# EAGLE board 2 (EAGLE 6.4)
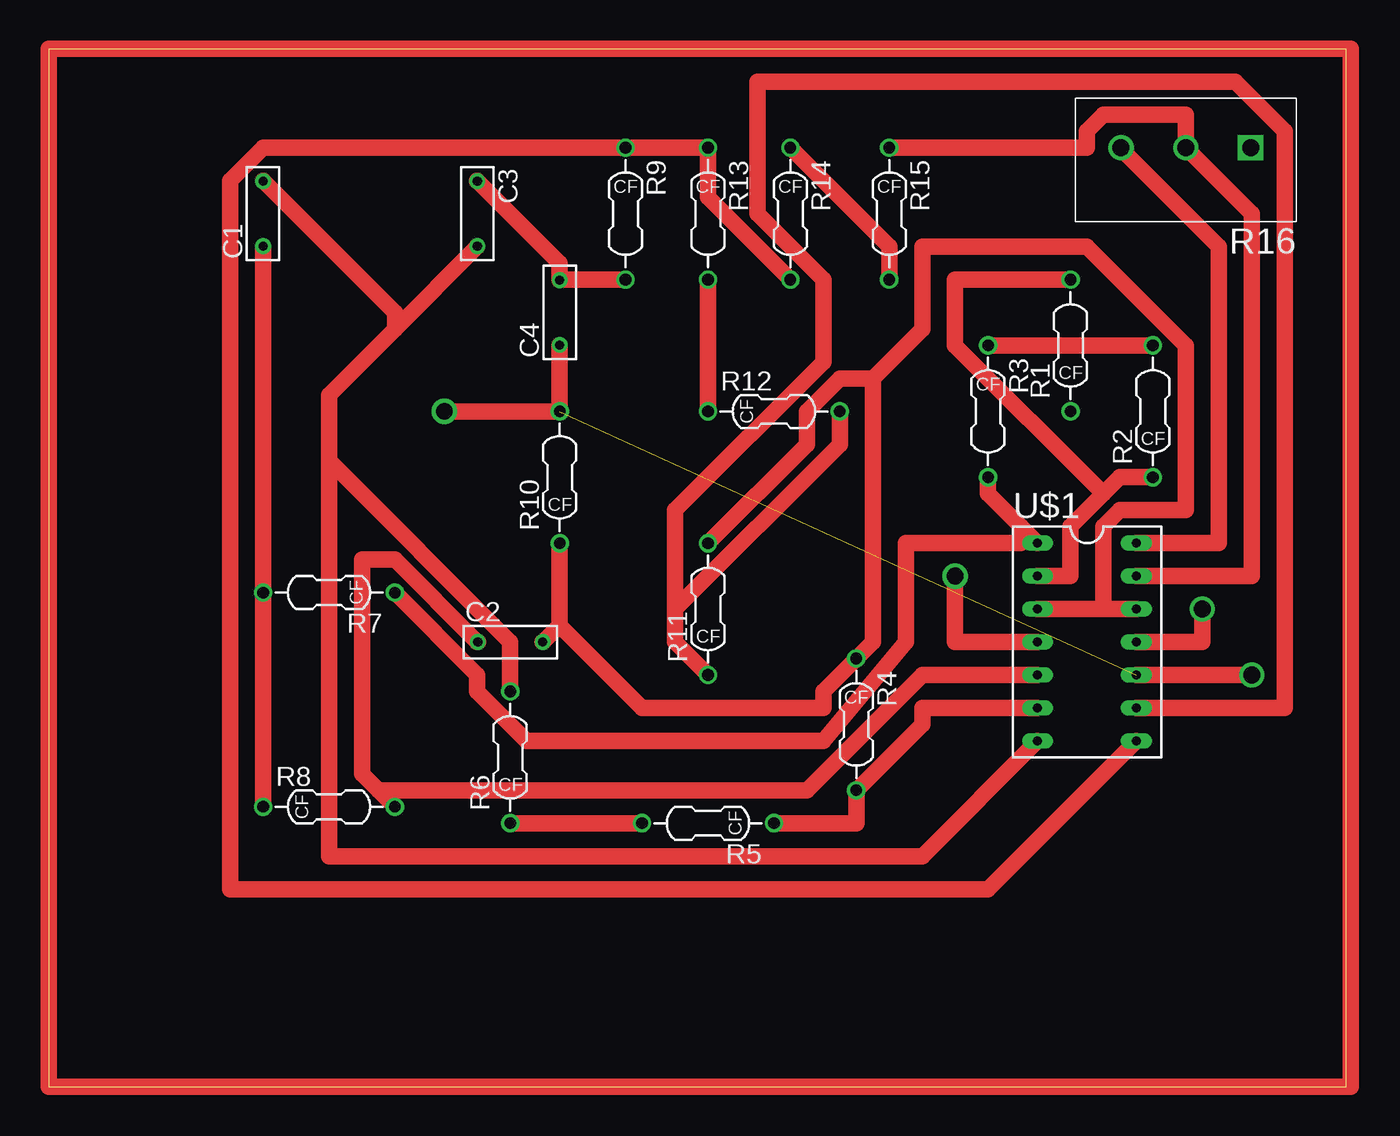
[diagram p0: board, top side]

Size 100 x 80 mm. Coordinates in mm from the lower left corner, seen from the top.
Outline: 0,0 100,0 100,80 0,80 0,0
Copper layers (1*16): Top 0.035mm / dielectric 1.5mm / Bottom 0.035mm
Design rules "default": minimum track width 10mil, minimum drill 24mil, track to track 8mil, track to pad 8mil, pad to pad 8mil, via to via 8mil, smd to smd 8mil, copper to edge 40mil, drill to drill 8mil, minimum pad ring 10mil, minimum via ring 8mil, stop-mask expansion 4mil, vias tented up to drill 0mil, thermal gap 10mil
Net classes: 0 default: width 1.27 mm, drill 1.27 mm, clearance 0.254 mm

## Footprints (pad centres in the part's own frame; a part is rotated, then mirrored left to right if it is on the bottom)
BOX-2.5MM-7.2MM = drill 0.7: P$1 -2.5,0; P$2 2.5,0
0.25W-0.4IN-CARBONFILM = drill 0.9: 1 -5.08,0; 2 5.08,0
POT-SIDE-16MM-BITECH-P160KN = drill 1.3 square: P$1 -5,3.8 | drill 1.3: P$2 0,3.8; P$3 5,3.8
DIP14 = drill 0.7 long: 1 0,7.62; 2 0,5.08; 3 0,2.54; 4 0,0; 5 0,-2.54; 6 0,-5.08; 7 0,-7.62; 8 7.62,-7.62; 9 7.62,-5.08; 10 7.62,-2.54; 11 7.62,0; 12 7.62,2.54; 13 7.62,5.08; 14 7.62,7.62

## Placement (x,y rotation side)
C1  10n  [BOX-2.5MM-7.2MM]  16.51,67.31 90 top
C2  10n  [BOX-2.5MM-7.2MM]  35.56,34.29 0 top
C3  10n  [BOX-2.5MM-7.2MM]  33.02,67.31 270 top
C4  10n  [BOX-2.5MM-7.2MM]  39.37,59.69 90 top
R1  100k  [0.25W-0.4IN-CARBONFILM]  78.74,57.15 90 top
R2  56k  [0.25W-0.4IN-CARBONFILM]  85.09,52.07 90 top
R3  6.8k  [0.25W-0.4IN-CARBONFILM]  72.39,52.07 270 top
R4  100k  [0.25W-0.4IN-CARBONFILM]  62.23,27.94 270 top
R5  56k  [0.25W-0.4IN-CARBONFILM]  50.8,20.32 180 top
R6  2.2k  [0.25W-0.4IN-CARBONFILM]  35.56,25.4 90 top
R7  5.6k  [0.25W-0.4IN-CARBONFILM]  21.59,38.1 180 top
R8  5.6k  [0.25W-0.4IN-CARBONFILM]  21.59,21.59 0 top
R9  56k  [0.25W-0.4IN-CARBONFILM]  44.45,67.31 270 top
R10  56k  [0.25W-0.4IN-CARBONFILM]  39.37,46.99 90 top
R11  100k  [0.25W-0.4IN-CARBONFILM]  50.8,36.83 90 top
R12  56k  [0.25W-0.4IN-CARBONFILM]  55.88,52.07 0 top
R13  2.2k  [0.25W-0.4IN-CARBONFILM]  50.8,67.31 270 top
R14  100  [0.25W-0.4IN-CARBONFILM]  57.15,67.31 270 top
R15  100k  [0.25W-0.4IN-CARBONFILM]  64.77,67.31 270 top
R16  100k  [POT-SIDE-16MM-BITECH-P160KN]  87.63,76.2 180 top
U$1  OPAMP-QUADTL074  [DIP14]  76.2,34.29 0 top

## Library data of the parts
C1-C4 = Capacitors; SPICE: C{NAME} {1.NET} {2.NET} {VALUE}
R1-R15 = Resistors; SPICE: R{NAME} {1.NET} {2.NET} {VALUE}
R16 = Potentiometers; PERCENT: 50; SPICE: R{NAME}CW {3.NET} {2.NET} {{{VALUE} - {{{ATTR.PERCENT} / 100} * {VALUE}}} + 0.001}\nR{NAME}CCW {2.NET} {1.NET} {{{{ATTR.PERCENT} / 100} * {VALUE}} + 0.001}
U$1 = Op Amps; SPICE: X{NAME}A {A.IN+.NET} {A.IN-.NET} {VCC.NET} {VEE.NET} {A.OUT.NET} TL074\nX{NAME}B {B.IN+.NET} {B.IN-.NET} {VCC.NET} {VEE.NET} {B.OUT.NET} TL074\nX{NAME}C {C.IN+.NET} {C.IN-.NET} {VCC.NET} {VEE.NET} {C.OUT.NET} TL074\nX{NAME}D {D.IN+.NET} {D.IN-.NET} {VCC.NET} {VEE.NET} {D.OUT.NET} TL074; SPICEMOD: .SUBCKT TL074 1 2 3 4 5\nC1 11 12 3.498E-12\nC2 6 7 15.00E-12\nDC 5 53 DX\nDE 54 5 DX\nDLP 90 91 DX\nDLN 92 90 DX\nDP 4 3 DX\nEGND 99 0 POLY(2) (3,0) (4,0) 0 .5 .5\nFB 7 99 POLY(5) VB VC VE VLP VLN 0 4.715E6 -5E6 5E6 5E6 -5E6\nGA 6 0 11 12 282.8E-6\nGCM 0 6 10 99 8.942E-9\nISS 3 10 DC 195.0E-6\nHLIM 90 0 VLIM 1K\nJ1 11 2 10 JX\nJ2 12 1 10 JX\nR2 6 9 100.0E3\nRD1 4 11 3.536E3\nRD2 4 12 3.536E3\nRO1 8 5 150\nRO2 7 99 150\nRP 3 4 2.143E3\nRSS 10 99 1.026E6\nVB 9 0 DC 0\nVC 3 53 DC 2.200\nVE 54 4 DC 2.200\nVLIM 7 8 DC 0\nVLP 91 0 DC 25\nVLN 0 92 DC 25\n.MODEL DX D(IS=800.0E-18)\n.MODEL JX PJF(IS=15.00E-12 BETA=270.1E-6 VTO=-1)\n.ENDS

## Nets
0: C2.P$2 R4.1 R10.1 R11.2 U$1.3 U$1.12
N$1: R1.2 R2.1 U$1.2
N$2: R2.2 R3.1
N$3: R3.2 R7.1 U$1.1
N$4: C1.P$1 R7.2 R8.1
N$5: C2.P$1 R8.2 U$1.5
N$6: R4.2 R5.1 U$1.6
N$7: R5.2 R6.1
N$8: R16.P$3 U$1.14
N$9: C3.P$1 C4.P$2 R9.2
N$11: R11.1 R12.2 U$1.9
N$12: R12.1 R13.2
N$13: R1.1
N$14: C4.P$1 R10.2 U$1.10
N$16: R14.1 R15.2
N$17: R15.1 R16.P$2 U$1.13
N$18: C1.P$2 C3.P$2 R6.2 U$1.7
N$19: R9.1 R13.1 R14.2 U$1.8
VCC: U$1.4
VEE: U$1.11

## Tracks (layer width: path | path; a pad name or v marks a point on that pad's centre or on a via)
0
  Top 1.27: 39.37,35.56 38.1,34.29 C2.P$2 | R10.1 39.37,35.56 | U$1.12 81.28,36.83 | 81.28,36.83 U$1.3 | R11.2 58.42,49.53 58.42,52.07 60.96,54.61 63.5,54.61 | 63.5,54.61 63.5,34.29 R4.1 59.69,30.48 59.69,29.21 45.72,29.21 39.37,35.56 | 81.28,36.83 81.28,43.18 82.55,44.45 87.63,44.45 87.63,57.15 80.01,64.77 67.31,64.77 67.31,58.42 63.5,54.61
N$1
  Top 1.27: U$1.2 78.74,39.37 78.74,43.18 81.28,45.72 | 81.28,45.72 82.55,46.99 R2.1 | R1.2 69.85,62.23 69.85,57.15 81.28,45.72
N$2
  Top 1.27: R2.2 R3.1
N$3
  Top 1.27: 74.93,43.18 72.39,45.72 R3.2 | 74.93,43.18 U$1.1 | R7.1 33.02,31.75 33.02,30.48 36.83,26.67 59.69,26.67 66.04,34.29 66.04,41.91 74.93,41.91 74.93,43.18
N$4
  Top 1.27: C1.P$1 R7.2 R8.1
N$5
  Top 1.27: R8.2 25.4,22.86 | 25.4,22.86 24.13,24.13 24.13,40.64 26.67,40.64 33.02,34.29 C2.P$1 | U$1.5 67.31,31.75 58.42,22.86 25.4,22.86
N$6
  Top 1.27: U$1.6 67.31,29.21 67.31,27.94 R4.2 62.23,20.32 R5.1
N$7
  Top 1.27: R5.2 R6.1
N$8
  Top 1.27: U$1.14 90.17,41.91 90.17,64.77 82.55,72.39 R16.P$3
N$9
  Top 1.27: R9.2 39.37,62.23 | 39.37,62.23 39.37,63.5 33.02,69.85 C3.P$1 | 39.37,62.23 C4.P$2
N$10
  Top 1.27: 0,80.01 0,0 100.33,0 100.33,80.01 0,80.01
N$11
  Top 1.27: U$1.9 95.25,29.21 95.25,73.66 91.44,77.47 54.61,77.47 54.61,67.31 59.69,62.23 59.69,55.88 48.26,44.45 48.26,36.83 | 48.26,36.83 48.26,34.29 R11.1 | R12.2 60.96,49.53 48.26,36.83
N$12
  Top 1.27: R13.2 R12.1
N$14  (via drill 1.3)  (1 unrouted)
  Top 1.27: C4.P$1 R10.2 v30.48,52.07 | U$1.10 v92.71,31.75
N$16
  Top 1.27: R14.1 64.77,64.77 R15.2
N$17
  Top 1.27: U$1.13 92.71,39.37 92.71,67.31 R16.P$2 87.63,74.93 81.28,74.93 80.01,73.66 80.01,72.39 R15.1
N$18
  Top 1.27: U$1.7 67.31,17.78 21.59,17.78 21.59,48.26 | 21.59,48.26 21.59,53.34 26.67,58.42 | 26.67,58.42 33.02,64.77 C3.P$2 | 26.67,58.42 26.67,59.69 16.51,69.85 C1.P$2 | R6.2 35.56,34.29 21.59,48.26
N$19
  Top 1.27: U$1.8 72.39,15.24 13.97,15.24 13.97,69.85 16.51,72.39 R9.1 R13.1 50.8,68.58 R14.2
VCC  (via drill 1.3)
  Top 1.27: U$1.4 69.85,34.29 v69.85,39.37
VEE  (via drill 1.3)
  Top 1.27: U$1.11 88.9,34.29 v88.9,36.83